# EAGLE board ManitoBoardv.7 (EAGLE 7.1.0)
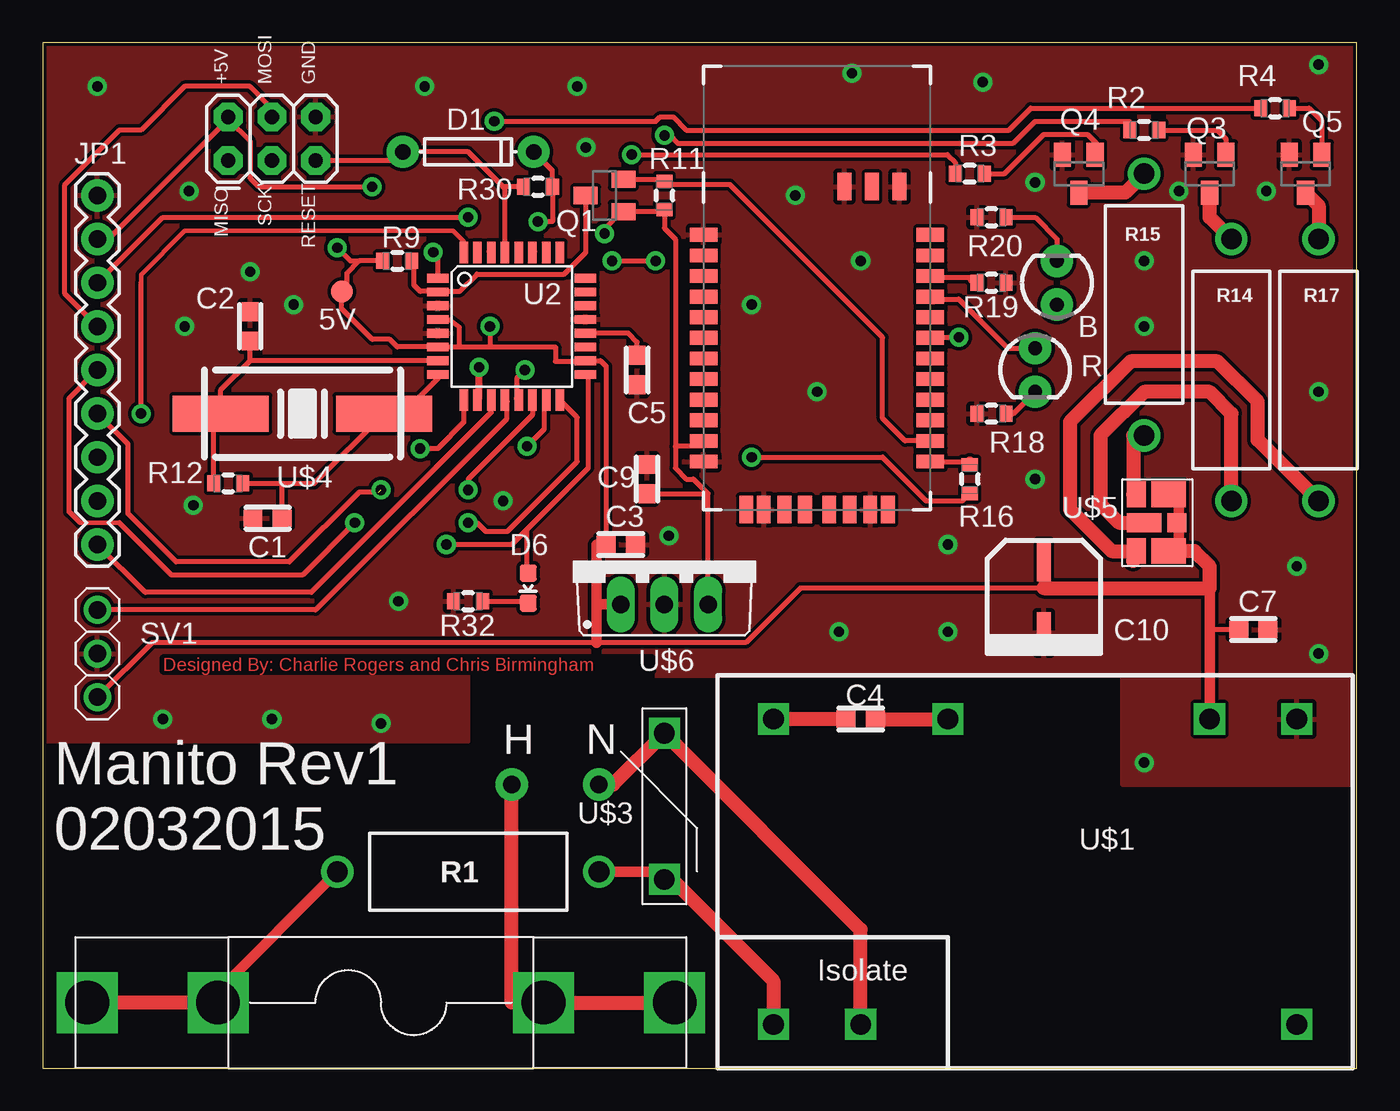
[diagram p0: board, top side]
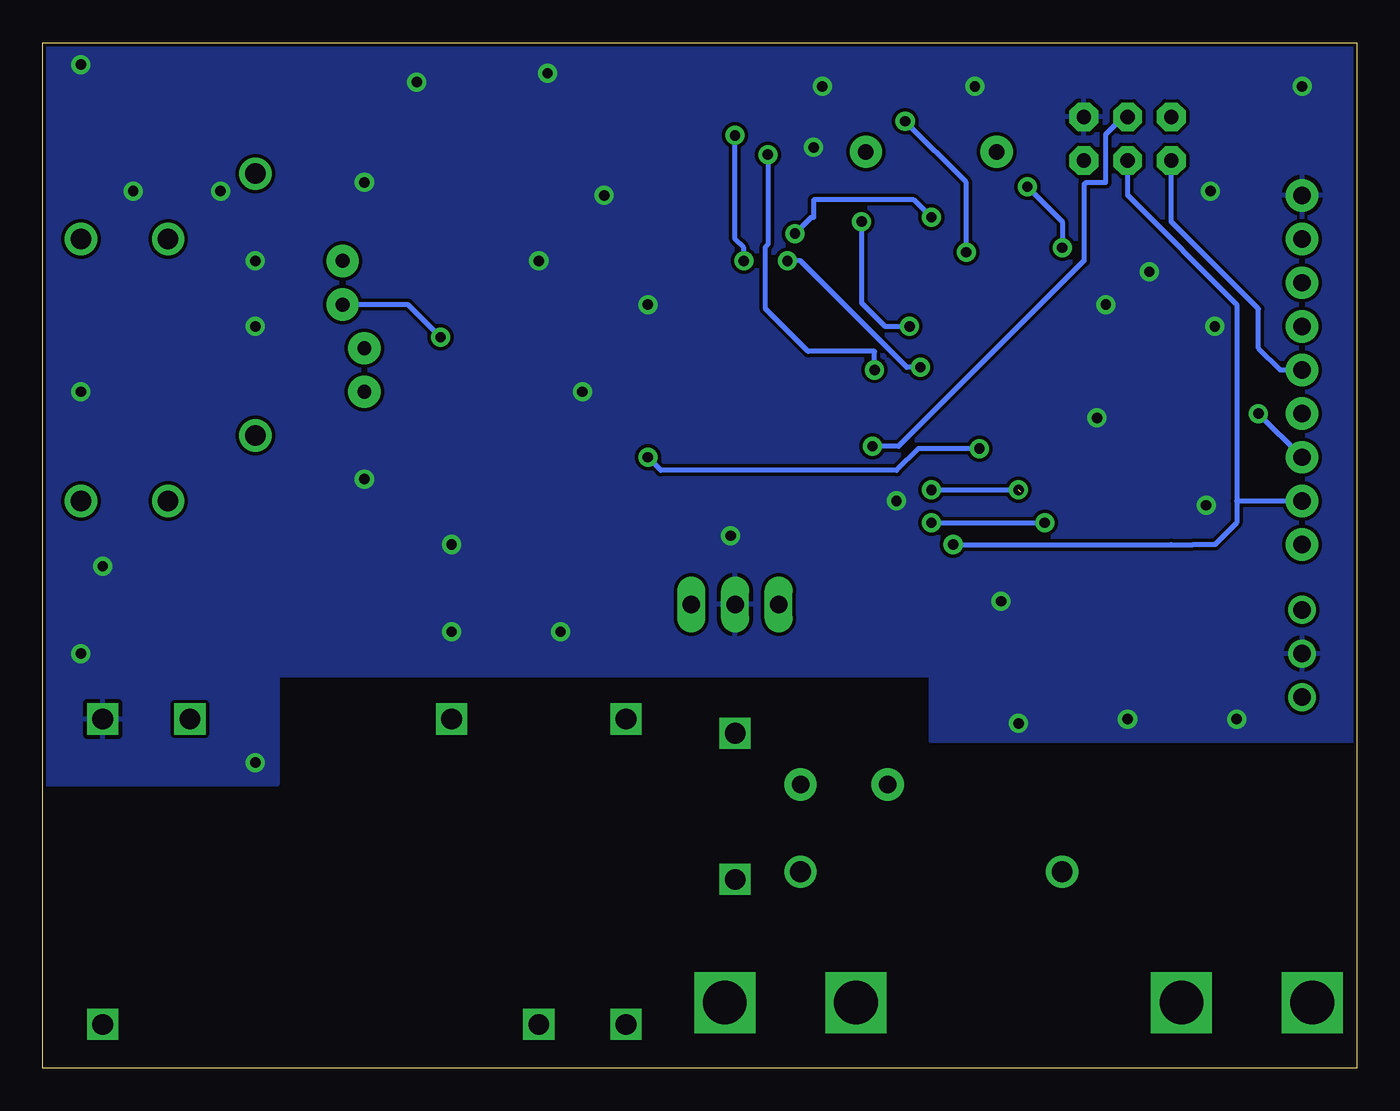
[diagram p1: board, bottom side, seen from below]

Size 76.5 x 59.68 mm. Coordinates in mm from the lower left corner, seen from the top.
Outline: 0,0 76.5,0 76.5,59.68 0,59.68 0,0
Copper layers (1*16): Top 0.035mm / dielectric 1.5mm / Bottom 0.035mm
Design rules "SparkFun *": minimum track width 8mil, minimum drill 20mil, track to track 8mil, track to pad 8mil, pad to pad 8mil, via to via 8mil, smd to smd 0mil, copper to edge 8mil, drill to drill 8mil, minimum pad ring 12mil, minimum via ring 10mil, stop-mask expansion 4mil, vias tented up to drill 20mil, thermal gap 10mil
Net classes: 2 gnd: width 0.305 mm, drill 0.559 mm, clearance 0.254 mm; 3 usbvcc: width 0.508 mm, drill 0.61 mm, clearance 0.254 mm

## Footprints (pad centres in the part's own frame; a part is rotated, then mirrored left to right if it is on the bottom)
SPRING-CONNECTOR = smd 1.27 x 1.27: P$2 0,0
LED3MM = drill 0.813 pad 1.88: A -1.27,0; K 1.27,0
0603-CAP = smd 1.1 x 1: 1 -0.85,0; 2 0.85,0
WXSERIES-SMDCAP = smd 0.8 x 2.4: NEG 0,-2.1; POS 0,2.1
DIODE-1N4148 = drill 0.9 pad 1.88: A -3.81,0; C 3.81,0
LED-0603 = smd 1 x 1: A 0,-0.877; C 0,0.877
1X09 = drill 1.016 pad 1.88: 1 0,0; 2 2.54,0; 3 5.08,0; 4 7.62,0; 5 10.16,0; 6 12.7,0; 7 15.24,0; 8 17.78,0; 9 20.32,0
1X01NS = drill 1.016 pad 1.88: 1 0,0
SOT23 = smd 1 x 1.4: 1 -0.95,-1.1; 2 0.95,-1.1; 3 0,1.1
AXIAL-0.6 = drill 1.2 pad 1.88: P$1 -7.62,0; P$2 7.62,0
0603RESISTOR = smd 0.762 x 0.94: 1 -0.838,0; 2 0.838,0
1X03 = drill 1.016: 1 -2.54,0; 2 0,0; 3 2.54,0
RN41 = smd 0.8 x 1.6: 1 -6.6,-6.6; 2 -5.4,-6.6; 3 -4.2,-6.6; 4 -3,-6.6; 5 -1.8,-6.6; 6 -0.6,-6.6; 7 0.6,-6.6; 8 1.8,-6.6; 9 3,-6.6; 10 4.2,-6.6; 11 5.4,-6.6; 12 6.6,-6.6; 13 6.6,6.6; 14 5.4,6.6; 15 4.2,6.6; 16 3,6.6; 17 1.8,6.6; 18 0.6,6.6; 19 -0.6,6.6; 20 -1.8,6.6; 21 -3,6.6; 22 -4.2,6.6; 23 -5.4,6.6; 24 -6.6,6.6 | smd 1.6 x 0.8: 25 -9.4,4.8; 26 -9.4,3.2; 27 -9.4,1.6; 28 9.4,3.1; 29 9.4,-3.1; 30 9.4,-4.122; 31 9.4,-1.9; 32 9.4,-0.7; 33 9.4,0.7; 34 9.4,1.9; 35 9.4,4.122
TQFP32-08 = smd 1.25 x 0.5: 1 -4.293,2.8; 2 -4.293,2; 3 -4.293,1.2; 4 -4.293,0.4; 5 -4.293,-0.4; 6 -4.293,-1.2; 7 -4.293,-2; 8 -4.293,-2.8; 17 4.293,-2.8; 18 4.293,-2; 19 4.293,-1.2; 20 4.293,-0.4; 21 4.293,0.4; 22 4.293,1.2; 23 4.293,2; 24 4.293,2.8 | smd 0.5 x 1.25: 9 -2.8,-4.293; 10 -2,-4.293; 11 -1.2,-4.293; 12 -0.4,-4.293; 13 0.4,-4.293; 14 1.2,-4.293; 15 2,-4.293; 16 2.8,-4.293; 25 2.8,4.293; 26 2,4.293; 27 1.2,4.293; 28 0.4,4.293; 29 -0.4,4.293; 30 -1.2,4.293; 31 -2,4.293; 32 -2.8,4.293
VSK-S3-DCAC = drill 1.2 square: 1 -15.24,-7.62; 3 -10.16,-7.62; 13 15.24,-7.62; 14 15.24,10.16; 16 10.16,10.16; 22 -5.08,10.16; 26 -15.24,10.16
FUSEHOLDER0.25IN = drill 2.54 square: P$1 9.474,0; P$2 17.107,0; P$3 -9.487,0; P$4 -17.107,0
MOV = drill 1.2 square: P$1 -4.255,0; P$2 4.255,0
SMDCRYSTAL = smd 5.588 x 2.108: P$1 -4.75,0; P$2 4.75,0
TRICOLORLED = smd 2.007 x 1.499: A1 -0.152,-1.651; A3 -0.152,1.651 | smd 1.092 x 1.092: A2 -0.635,0 | smd 1.092 x 1.499: C1 1.727,-1.651; C3 1.727,1.651 | smd 2.007 x 1.092: C2 1.27,0
TO220 = drill 1.016 long: COM 0,-2.54; IN -2.54,-2.54; OUT 2.54,-2.54
2X3-ICSP = drill 0.826 pad 1.676 octagon: 1 -2.54,-1.27; 2 -2.54,1.27; 3 0,-1.27; 4 0,1.27; 5 2.54,-1.27; 6 2.54,1.27

## Placement (x,y rotation side)
5V  M01SPRING-CONN  [SPRING-CONNECTOR]  17.4,45.21 0 top
B  [LED3MM]  59.05,45.72 90 top
C1  22p  [0603-CAP]  13.08,32 0 top
C2  22p  [0603-CAP]  12.06,43.18 90 top
C3  100n  [0603-CAP]  33.66,30.48 0 top
C4  4.7u  [0603-CAP]  47.62,20.32 0 top
C5  100n  [0603-CAP]  34.61,40.64 270 top
C7  100n  [0603-CAP]  70.48,25.53 180 top
C9  4.7u  [0603-CAP]  35.18,34.29 90 top
C10  100u  [WXSERIES-SMDCAP]  58.29,27.43 0 top
D1  [DIODE-1N4148]  24.77,53.34 0 top
D6  [LED-0603]  28.26,27.94 180 top
JP1  M09  [1X09]  3.17,50.8 270 top
LINE  M01SMDNS  [1X01NS]  27.3,16.51 0 top
NEUTRAL  M01SMDNS  [1X01NS]  32.38,16.51 0 top
Q1  [SOT23]  32.7,50.8 90 top
Q3  [SOT23]  67.94,52.07 180 top
Q4  [SOT23]  60.32,52.07 180 top
Q5  [SOT23]  73.53,52.07 180 top
R  [LED3MM]  57.79,40.64 270 top
R1  15  [AXIAL-0.6]  24.77,11.43 180 top
R2  1k  [0603RESISTOR]  64.13,54.61 0 top
R3  1k  [0603RESISTOR]  53.98,52.07 0 top
R4  1k  [0603RESISTOR]  71.75,55.88 0 top
R9  10k  [0603RESISTOR]  20.64,46.99 0 top
R11  10k  [0603RESISTOR]  36.2,50.8 90 top
R12  1M  [0603RESISTOR]  10.8,34.04 180 top
R14  15  [AXIAL-0.6]  69.22,40.64 270 top
R15  15  [AXIAL-0.6]  64.13,44.45 270 top
R16  10k  [0603RESISTOR]  53.98,34.29 90 top
R17  15  [AXIAL-0.6]  74.29,40.64 270 top
R18  330  [0603RESISTOR]  55.24,38.1 0 top
R19  10k  [0603RESISTOR]  55.24,45.72 180 top
R20  330  [0603RESISTOR]  55.24,49.53 0 top
R30  10k  [0603RESISTOR]  28.83,51.31 0 top
R32  1k  [0603RESISTOR]  24.77,27.18 0 top
SV1  [1X03]  3.17,24.13 270 top
U1  BLUETOOTH-RN41"  [RN41]  45.09,41.91 270 top
U2  ATMEGA328P  [TQFP32-08]  27.3,43.18 0 top
U$1  VSK-S3-5U1  [VSK-S3-DCAC]  57.79,10.16 0 top
U$2  0313.500MXP1  [FUSEHOLDER0.25IN]  19.68,3.81 0 top
U$3  MOV1  [MOV]  36.2,15.24 270 top
U$4  16MHz  [SMDCRYSTAL]  15.11,38.1 0 top
U$5  LEDTRICOLOR  [TRICOLORLED]  65.41,31.75 180 top
U$6  UA78M33CKCSE3  [TO220]  36.2,29.53 0 top
U$10  6PIN-ICSP  [2X3-ICSP]  13.34,54.1 0 top

## Library data of the parts
5V C1-C5 C7 C9 C10 D1 LINE NEUTRAL Q3-Q5 U$1-U$6 U$10 = CharlieCreations
B R = SparkFun-LED
D6 = CharlieCreations; PROD_ID: DIO-09003
JP1 = SparkFun-Connectors
Q1 SV1 = adafruit
R1 R14 R15 R17 = SparkFun-Passives
R2-R4 R9 R11 R12 R16 R18-R20 R30 R32 = CharlieCreations; MPN: CRCW06031K21FKEA; OC_FARNELL: 1652852; OC_NEWARK: 52K8027; SUPPLIER: Vishay; TOLERANCE: ± 1.0 %; WATTAGE: 0.1W
U1 = SparkFun
U2 = CharlieCreations; PROD_ID: IC-09069

## Nets
+5V [usbvcc]: 5V.P$2 C3.1 C7.2 C10.POS D1.C JP1.2 R9.1 R30.2 SV1.3 U2.4 U2.6 U2.18 U$1.16 U$5.A1 U$5.A2 U$5.A3 U$6.IN U$10.2
AD0: U2.23
AD1: U2.24
AD2: U2.25
AD3: U2.26
AD6: U2.19
AD7: U2.22
CTS: U1.16
GND: C1.1 C2.2 C3.2 C5.2 C7.1 C9.2 C10.NEG JP1.1 Q3.2 Q4.2 Q5.2 R18.1 R19.1 R20.1 R32.1 SV1.2 U1.1 U1.12 U1.25 U1.27 U1.28 U1.29 U2.3 U2.5 U2.21 U$1.14 U$6.COM U$10.6
IO0: U2.30
IO1: U2.31
IO2/INT: JP1.7 U2.32
IO3: R4.1 U2.1
IO4/TX: Q1.3 R9.2 U2.2
IO5/RX: R16.1 U2.9
IO6: R2.1 U2.10
IO7/EN: JP1.9 U2.11
IO8/PIR_SIG: SV1.1 U2.12
IO9: R3.1 U2.13
IO10/SS: JP1.6 U2.14
IO11/MOSI: JP1.4 U2.15 U$10.4
IO12/MISO: JP1.5 U2.16 U$10.1
IO13/SCK: D6.A JP1.8 U2.17 U$10.3
N$1: C1.2 R12.1 U2.8 U$4.P$2
N$3: R18.2 R.K
N$4: C2.1 R12.2 U2.7 U$4.P$1
N$6: Q5.3 R17.P$1
N$7: Q4.3 R15.P$1
N$8: Q3.3 R14.P$1
N$14: Q3.1 R2.2
N$15: Q5.1 R4.2
N$16: Q4.1 R3.2
N$17: C5.1 U2.20
N$18: D6.C R32.2
N$19: C4.1 U$1.26
N$20: B.K R20.2
N$21: C4.2 U$1.22
N$22: R1.P$1 U$1.1 U$3.P$2
N$23: NEUTRAL.1 U$1.3 U$3.P$1
N$24: LINE.1 U$2.P$1 U$2.P$2
N$25: R1.P$2 U$2.P$3 U$2.P$4
N$29: R14.P$2 U$5.C2
N$30: R15.P$2 U$5.C1
N$31: R17.P$2 U$5.C3
N$32: R.A U1.21
N$33: R19.2 U1.22
N$34: B.A U1.19
RESET: D1.A R30.1 U2.29 U$10.5
RTS: U1.15
RX: R16.2 U1.13
SCL/AD5: U2.28
SDA/AD4: U2.27
TX: Q1.2 R11.2 U1.14
VCC: C9.1 JP1.3 Q1.1 R11.1 U1.11 U$6.OUT

## Tracks (layer width: path | path; a pad name or v marks a point on that pad's centre or on a via)
+5V  (via drill 0.6)
  Top 0.305: R9.1 18.41,46.99 | JP1.2 3.81,48.26 10.8,55.24 | 58.29,27.94 44.12,27.94 40.94,24.77 32.23,24.77 6.35,24.77 SV1.3 | U2.6 24.26,41.98 24.26,43.12 23.69,43.56 23.01,43.56 U2.4 | U2.6 26.03,41.98 | 26.03,41.98 29.84,41.98 29.84,41.15 31.6,41.15 U2.18 32.47,41.18 32.8,40.85 C3.1 | C7.2 68.07,25.53 67.94,25.4 | 18.41,46.99 17.7,46.28 17.7,45.52 5V.P$2 17.4,44.2 19.18,42.42 20.19,42.42 20.63,41.98 U2.6 | D1.C 29.67,52.25 R30.2 29.67,49.28 v28.83,49.28 | 10.8,55.24 U$10.2 | 10.8,55.24 12.06,53.97 12.06,51.82 12.57,51.31 v19.18,51.31 | v17.14,47.75 17.91,46.99 18.41,46.99 | v26.03,43.18 26.03,41.98
  Top 0.61: 32.23,26.78 32.38,26.99 U$6.IN | U$5.A3 66.04,30.58 | 65.56,33.5 U$5.A1 65.56,33.27 66.17,33.27 66.17,30.58 66.04,30.58 | C3.1 32.23,30.48 32.23,26.78 | 32.23,24.77 32.23,26.78 | U$1.16 67.94,25.4 67.94,27.94 | 66.04,30.58 66.04,30.48 66.17,30.48 66.17,31.75 U$5.A2 | C10.POS 58.29,27.94
  Top 0.813: U$5.A3 67.06,30.1 67.94,29.21 67.94,27.94 58.29,27.94
  Bottom 0.305: v19.18,51.31 17.14,49.28 v17.14,47.75 | v28.83,49.28 28.83,44.55 27.46,43.18 v26.03,43.18
GND  (via drill 0.6)
  other vias: 19.68,20.07 12.06,46.35 6.98,20.32 8.25,43.18 14.6,44.45 8.76,32.77 64.13,17.78 45.09,39.37 47.62,46.99 73.03,29.21 74.29,39.37 64.13,46.99 74.29,58.42 47.12,57.91 41.27,44.45 22.23,57.15 3.17,57.15 52.71,30.48 31.12,57.15 31.62,53.59 15.11,37.85 20.7,27.18 36.45,30.99 74.29,24.13 26.8,33.02 8.51,51.05 57.79,51.56 66.17,51.05 71.25,51.05 64.13,43.18 43.82,50.8 54.74,57.4 52.71,25.4 13.34,20.32 57.79,34.29 46.35,25.4
  pour Top: -1.91,19.05 24.77,19.05 24.77,21.59 24.77,22.86 62.87,22.86 62.87,16.51 79.38,16.51 79.38,50.8 79.38,64.77 -1.91,64.77
  pour Bottom: -1.91,19.05 24.77,19.05 24.77,22.86 62.87,22.86 62.87,16.51 79.38,16.51 79.38,64.77 -1.91,64.77
IO0
  Top 0.406: 26.03,47.54 U2.30
IO2/INT  (via drill 0.6)
  Top 0.254: U2.32 24.5,48.13 23.9,48.74 8.25,48.74 5.71,46.2 5.71,45.72
  Top 0.305: v5.71,38.1 5.71,45.72
  Bottom 0.305: JP1.7 v5.71,38.1
IO3  (via drill 0.6)
  Top 0.305: U2.1 23.01,47.22 v22.73,47.5 | v26.29,55.12 35.69,55.12 35.94,55.37 36.7,55.37 37.46,54.61 56.26,54.61 57.53,55.88 R4.1
  Bottom 0.305: v22.73,47.5 22.73,51.56 v26.29,55.12
IO4/TX
  Top 0.305: Q1.3 31.6,47.48 30.35,46.23 25.27,46.23 24.26,45.21 23.01,45.21 | R9.2 21.59,46.99 21.59,45.59 21.97,45.21 23.01,45.21 | 23.01,45.09 U2.2 23.01,45.21
IO5/RX  (via drill 0.6)
  Top 0.305: U2.9 24.5,37.59 22.99,36.07 v21.97,36.07 | v41.27,35.56 48.9,35.56 51.43,33.02 53.54,33.02 R16.1
  Bottom 0.305: v21.97,36.07 25.53,36.07 26.8,34.8 40.51,34.8 v41.27,35.56
IO6  (via drill 0.6)
  Top 0.305: v33.15,46.99 v35.69,46.99 | v36.2,54.29 36.51,54.29 36.96,53.85 56.51,53.85 57.79,55.12 63.3,55.12 R2.1
  Top 0.406: U2.10 25.4,38.98 v25.4,40.8
  Bottom 0.305: v36.2,54.29 36.2,48.26 35.69,47.75 v35.69,46.99 | v25.4,40.8 26.19,40.8 32.38,46.99 v33.15,46.99
IO7/EN
  Top 0.305: U2.11 26.1,38.17 15.62,27.69 5.97,27.69 JP1.9
IO8/PIR_SIG
  Top 0.305: 26.99,38.8 26.99,37.78 15.88,26.67 SV1.1
  Top 0.406: U2.12 26.99,38.8
IO9  (via drill 0.6)
  Top 0.305: 27.62,38.97 27.62,40.2 v28.07,40.64 | v34.29,53.18 52.68,53.18 53.14,52.72 R3.1
  Top 0.406: U2.13 27.62,38.97
  Bottom 0.305: v34.29,53.18 34.29,47.94 34.42,47.82 34.42,44.2 31.94,41.72 28.07,41.72 v28.07,40.64
IO10/SS  (via drill 0.6)  (1 unrouted)
  Top 0.305: U2.14 28.5,38.03 24.77,34.29 v24.77,33.66 | JP1.6 4.95,36.32 4.95,32.26 7.75,29.46 14.35,29.46 18.41,33.53 18.67,33.53 19.56,33.53
  Bottom 0.305: v24.77,33.66 v19.68,33.66
IO11/MOSI  (via drill 0.6)
  Top 0.305: v28.19,36.2 29.21,37.21 29.21,38.79 U2.15 | JP1.4 1.27,45.09 1.27,51.43 4.45,54.61 5.71,54.61 8.25,57.15 12.06,57.15 13.34,55.88 U$10.4
  Bottom 0.305: v28.19,36.2 26.67,36.2 15.88,46.99 15.88,51.43 15.75,51.56 14.6,51.56 14.6,54.36 13.59,55.37 U$10.4
IO12/MISO  (via drill 0.6)
  Top 0.254: 4.45,31.75 2.16,31.75
  Top 0.305: v18.16,31.75 15.11,28.7 7.49,28.7 4.45,31.75 | 2.16,31.75 1.52,32.38 1.52,38.99 JP1.5 | v24.77,31.75 25.27,31.75 25.78,31.24 27.05,31.24 31.12,35.31 31.12,37.88 U2.16
  Bottom 0.305: JP1.5 4.45,40.64 5.71,41.91 5.71,44.2 10.8,49.28 U$10.1 | v24.77,31.75 v18.16,31.75
IO13/SCK  (via drill 0.6)
  Top 0.305: U2.17 31.75,40.38 31.75,34.92 28.19,31.37 | 28.19,31.37 27.3,30.48 v23.49,30.48 | D6.A 28.19,28.82 28.19,31.37
  Bottom 0.305: 6.98,33.02 6.98,44.45 13.34,50.8 U$10.3 | 6.98,33.02 JP1.8 | v23.49,30.48 10.8,30.48 9.52,30.48 8.25,30.48 6.98,31.75 6.98,33.02
N$1
  Top 0.305: U2.8 23.01,40.16 20.95,38.1 | R12.1 13.84,34.04 | 13.84,34.04 15.8,34.04 U$4.P$2 | C1.2 13.93,33.95 13.84,34.04
  Top 0.406: U$4.P$2 20.95,38.1
N$3
  Top 0.305: R18.2 56.51,38.1 R.K
N$4
  Top 0.305: U2.7 12.06,41.18 | 12.06,41.18 10.36,39.48 U$4.P$1 9.96,38 R12.2 | 12.06,41.18 C2.1
N$6
  Top 0.813: Q5.3 74.29,50.21 R17.P$1
N$7
  Top 0.813: R15.P$1 63.04,50.97 Q4.3
N$8
  Top 0.813: R14.P$1 67.94,49.53 Q3.3
N$14
  Top 0.305: R2.2 68.38,54.61 68.9,54.1 Q3.1
N$15
  Top 0.305: R4.2 73.74,55.88 74.48,55.14 Q5.1
N$16
  Top 0.305: R3.2 56.01,52.07 58.29,54.36 60.83,54.36 61.34,53.85 61.34,53.24 Q4.1
N$17
  Top 0.305: C5.1 34.61,42.27 34.1,42.78 U2.20
N$18
  Top 0.305: 28.26,27.1 D6.C 28.14,27.18 R32.2
N$19
  Top 0.813: C4.1 U$1.26
N$20
  Top 0.305: R20.2 57.79,49.53 59.05,48.26 B.K
N$21
  Top 0.813: C4.2 U$1.22
N$22
  Top 0.61: R1.P$1 35.75,11.43 U$3.P$2
  Top 0.813: 36.2,11.43 U$3.P$2 36.64,10.99 42.54,5.08 U$1.1
N$23
  Top 0.61: U$3.P$1 36.2,19.05
  Top 0.813: U$1.3 47.62,8.06 U$3.P$1 33.21,16.51 NEUTRAL.1
N$24
  Top 0.813: LINE.1 27.3,3.81 U$2.P$1 U$2.P$2
N$25
  Top 0.61: U$2.P$3 10.2,4.48 R1.P$2
  Top 0.813: 8.69,3.81 U$2.P$3 U$2.P$4
N$29
  Top 0.813: R14.P$2 69.22,38.1 67.94,39.37 64.13,39.37 61.59,36.83 61.59,32.83 62.67,31.75 U$5.C2
N$30
  Top 0.61: 63.5,33.4 U$5.C1
  Top 0.813: R15.P$2 63.5,36.83 63.5,33.4
N$31
  Top 0.813: 63.5,29.53 63.68,29.71 U$5.C3 62.24,30.1 59.82,32.52 59.82,37.62 63.35,41.15 68.4,41.15 70.74,38.81 70.74,36.58 R17.P$2
N$32
  Top 0.305: 51.83,44.77 53.34,44.77 56.2,41.91 R.A
  Top 0.61: U1.21 51.83,44.77
N$33
  Top 0.305: 51.76,46.04 53.98,46.04 arc90 54.29,45.72
  Top 0.61: U1.22 arc90 51.76,46.04 | 54.29,45.72 R19.2
N$34  (via drill 0.6)
  Top 0.305: 51.72,42.54 v53.34,42.54
  Top 0.61: U1.19 51.72,42.54
  Bottom 0.305: v53.34,42.54 55.24,44.45 B.A
RESET
  Top 0.305: U2.29 26.91,51.2 26.8,51.31 | 26.8,51.31 24.77,53.34 D1.A 20.45,52.83 U$10.5 | R30.1 26.8,51.31
RX
  Top 0.305: R16.2 arc-90 54.23,35.2 | U1.13 53.98,35.31
  Top 0.61: 53.98,35.31 R16.2
SDA/AD4
  Top 0.406: U2.27 28.57,47.54
TX
  Top 0.305: 33.49,51.75 36.08,51.75 R11.2 36.2,51.43 40,51.43 43.18,48.26 48.9,42.54 48.9,37.82 50.21,36.51 U1.14
  Top 0.61: U1.14 arc90 U1.14 | 33.49,51.75 arc90 Q1.2
VCC  (via drill 0.6)
  Top 0.305: JP1.3 6.98,49.53 v24.77,49.53 | 36.83,36.2 36.83,48.26 36.2,48.89 R11.1 36.2,49.85 Q1.1 33.71,49.85 32.7,48.84 v32.7,48.58 | 36.83,36.2 36.83,34.92 37.46,34.29 37.88,34.29 38.73,33.44 | U$6.OUT 38.73,33.44 | U1.11 38.48,36.2 36.83,36.2 | C9.1 38.73,33.44
  Top 0.61: 33.49,49.85 arc-90 Q1.1
  Bottom 0.305: v32.7,48.58 31.75,49.53 31.62,49.53 31.62,50.55 25.78,50.55 v24.77,49.53

## Text on the board
Top: Designed By: Charlie Rogers and Chris Birmingham
tPlace: H | N | Manito Rev1 | 02032015